# EAGLE board RowDriver (EAGLE 6.3)
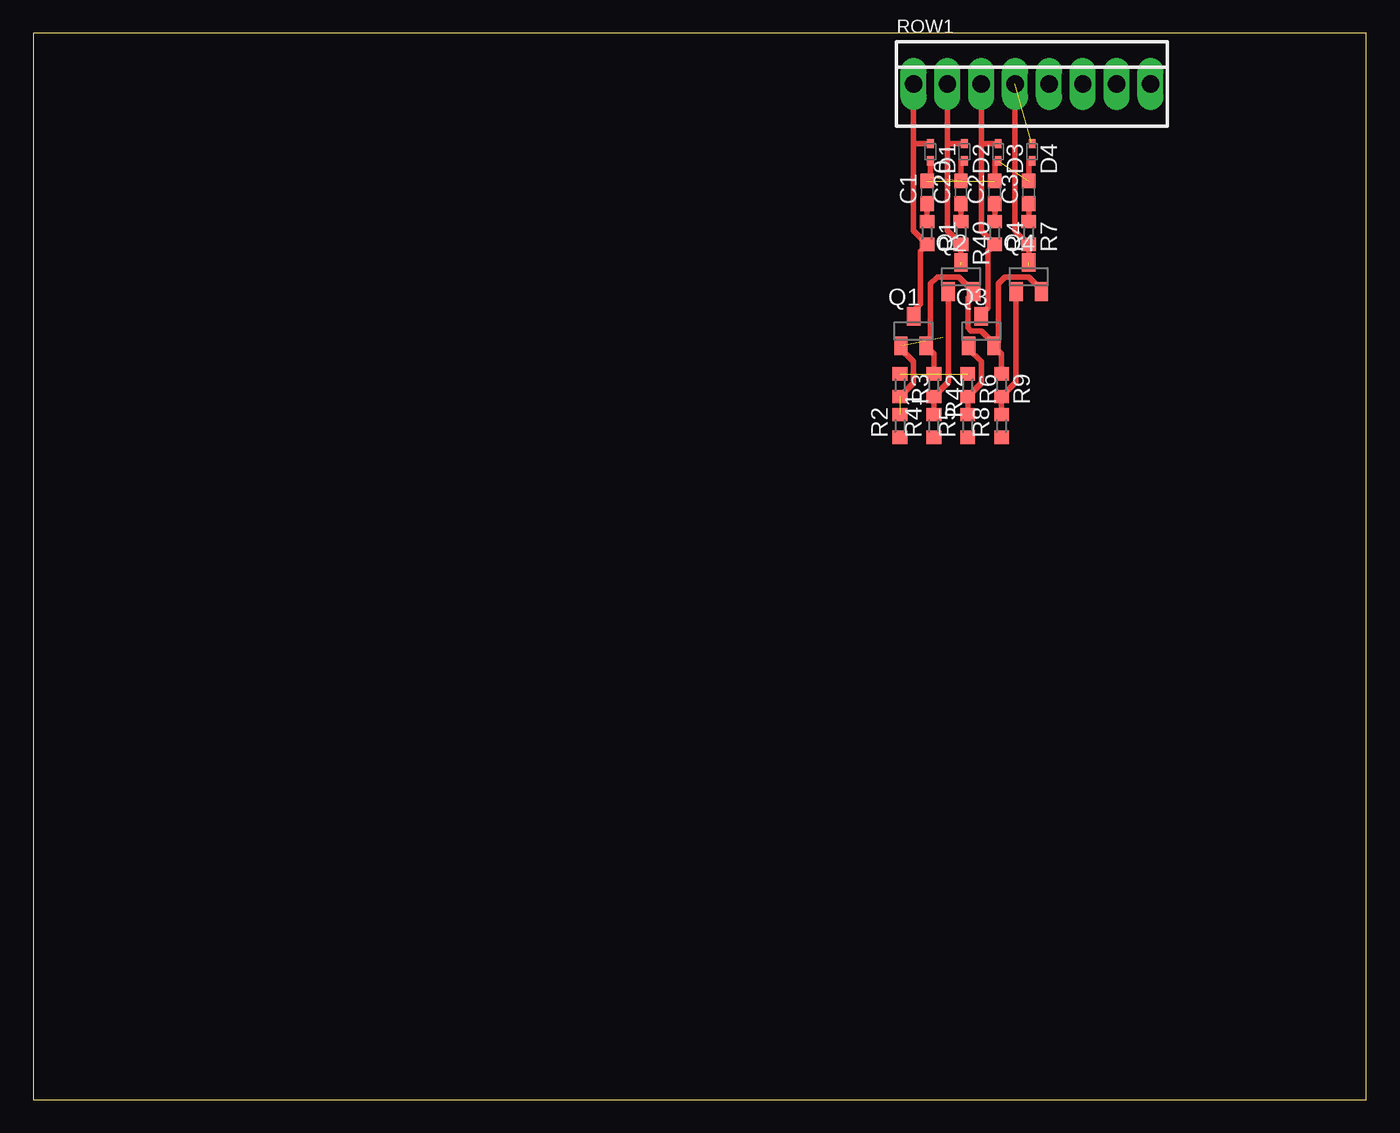
[diagram p0: board, top side]

Size 100 x 80 mm. Coordinates in mm from the lower left corner, seen from the top.
Outline: 0,0 100,0 100,80 0,80 0,0
Copper layers (1*16): Top 0.035mm / dielectric 1.5mm / Bottom 0.035mm
Design rules "default": minimum track width 10mil, minimum drill 24mil, track to track 8mil, track to pad 8mil, pad to pad 8mil, via to via 8mil, smd to smd 8mil, copper to edge 40mil, drill to drill 8mil, minimum pad ring 10mil, minimum via ring 8mil, stop-mask expansion 4mil, vias tented up to drill 0mil, thermal gap 10mil

## Footprints (pad centres in the part's own frame; a part is rotated, then mirrored left to right if it is on the bottom)
C0603 = smd 1.1 x 1: 1 -0.85,0; 2 0.85,0
SOD523 = smd 0.7 x 0.5: A 0.7,0; C -0.6,0
SOT23 = smd 1 x 1.4: 1 -0.95,-1.1; 2 0.95,-1.1; 3 0,1.1
R0603 = smd 1 x 1.1: 1 -0.85,0; 2 0.85,0
OSTVN08 = drill 1.3 long: 1 -8.89,0; 2 -6.35,0; 3 -3.81,0; 4 -1.27,0; 5 1.27,0; 6 3.81,0; 7 6.35,0; 8 8.89,0

## Placement (x,y rotation side)
C1  22n  [C0603]  67.06,68.07 90 top
C2  22n  [C0603]  72.14,68.07 90 top
C3  22n  [C0603]  74.68,68.07 90 top
C20  22n  [C0603]  69.6,68.07 90 top
D1  RB521S30T1G  [SOD523]  67.31,71.12 270 top
D2  RB521S30T1G  [SOD523]  69.85,71.12 270 top
D3  RB521S30T1G  [SOD523]  72.39,71.12 270 top
D4  RB521S30T1G  [SOD523]  74.93,71.12 270 top
Q1  DPBT8105  [SOT23]  66.04,57.66 0 top
Q2  DPBT8105  [SOT23]  69.6,61.72 0 top
Q3  DPBT8105  [SOT23]  71.12,57.66 0 top
Q4  DPBT8105  [SOT23]  74.68,61.72 0 top
R1  20  [R0603]  67.06,65.02 270 top
R2  750  [R0603]  65.02,50.55 90 top
R3  NC  [R0603]  65.02,53.59 270 top
R4  20  [R0603]  72.14,65.02 270 top
R5  750  [R0603]  70.1,50.55 90 top
R6  NC  [R0603]  70.1,53.59 270 top
R7  20  [R0603]  74.68,65.02 270 top
R8  750  [R0603]  72.64,50.55 90 top
R9  NC  [R0603]  72.64,53.59 270 top
R40  20  [R0603]  69.6,65.02 270 top
R41  750  [R0603]  67.56,50.55 90 top
R42  NC  [R0603]  67.56,53.59 270 top
ROW1  [OSTVN08]  74.93,76.2 0 top

## Library data of the parts
C1-C3 C20 R1-R9 R40-R42 = resistor
D1-D4 = diode
Q1-Q4 ROW1 = Parts

## Nets
+5V: Q1.2 Q2.2 Q3.2 Q4.2 R3.1 R6.1 R9.1 R42.1
GND: C1.2 C2.2 C3.2 C20.2 D1.A D2.A D3.A D4.A
N$1: Q1.1 R2.2 R3.2
N$2: C1.1 R1.1
N$3: Q3.1 R5.2 R6.2
N$4: C2.1 R4.1
N$5: Q4.1 R8.2 R9.2
N$6: C3.1 R7.1
N$33: Q2.1 R41.2 R42.2
N$34: C20.1 R40.1
ROW0: D2.C Q2.3 R40.2 ROW1.2
ROW0EN_: R41.1
ROW1: D1.C Q1.3 R1.2 ROW1.1
ROW1EN_: R2.1
ROW2: D3.C Q3.3 R4.2 ROW1.3
ROW2EN_: R5.1
ROW3: D4.C Q4.3 R7.2 ROW1.4
ROW3EN_: R8.1

## Tracks (layer width: path | path; a pad name or v marks a point on that pad's centre or on a via)
+5V  (2 unrouted)
  Top 0.406: Q3.2 72.07,56.71 71.12,57.66 70.36,57.66 70.1,57.91 70.1,60.18 Q2.2 69.45,61.72 67.82,61.72 67.31,61.21 67.31,57.15 66.99,56.83 Q1.2 67.56,55.98 R42.1 | Q4.2 75.63,60.77 74.68,61.72 72.9,61.72 72.39,61.21 72.39,56.88 Q3.2 | R9.1 72.64,55.98 Q3.2
GND  (3 unrouted)
  Top 0.406: D2.A 69.6,70.42 C20.2 | D1.A 67.31,69.18 C1.2 | D3.A 72.14,70.42 C2.2 | D4.A 74.68,70.42 C3.2
N$1  (2 unrouted)
  Top 0.406: Q1.1 65.09,56.32 66.04,55.37 66.04,53.76 R3.2
N$2
  Top 0.406: R1.1 C1.1
N$3
  Top 0.406: Q3.1 70.17,56.32 71.12,55.37 71.12,53.76 R6.2 R5.2
N$4
  Top 0.406: R4.1 C2.1
N$5
  Top 0.406: Q4.1 73.73,53.83 R9.2 R8.2
N$6
  Top 0.406: R7.1 C3.1
N$33
  Top 0.406: Q2.1 68.65,53.83 R42.2 R41.2
N$34
  Top 0.406: C20.1 R40.1
ROW0  (1 unrouted)
  Top 0.406: 68.58,71.72 68.58,65.19 R40.2 69.6,62.57 | D2.C 68.58,71.72 | ROW1.2 68.58,71.72
ROW1
  Top 0.406: ROW1.1 66.04,71.72 | 66.04,71.72 D1.C | 66.04,71.72 66.04,65.19 R1.2 66.55,63.67 66.55,59.69 66.04,59.18 Q1.3
ROW2
  Top 0.406: ROW1.3 71.12,71.72 | 71.12,71.72 71.12,65.19 R4.2 71.63,63.67 71.63,59.44 71.12,58.93 Q3.3 | D3.C 71.12,71.72
ROW3  (2 unrouted)
  Top 0.406: ROW1.4 73.66,65.19 R7.2 74.68,62.57